# EAGLE board DP-webplatformv1.1a (EAGLE 5.11)
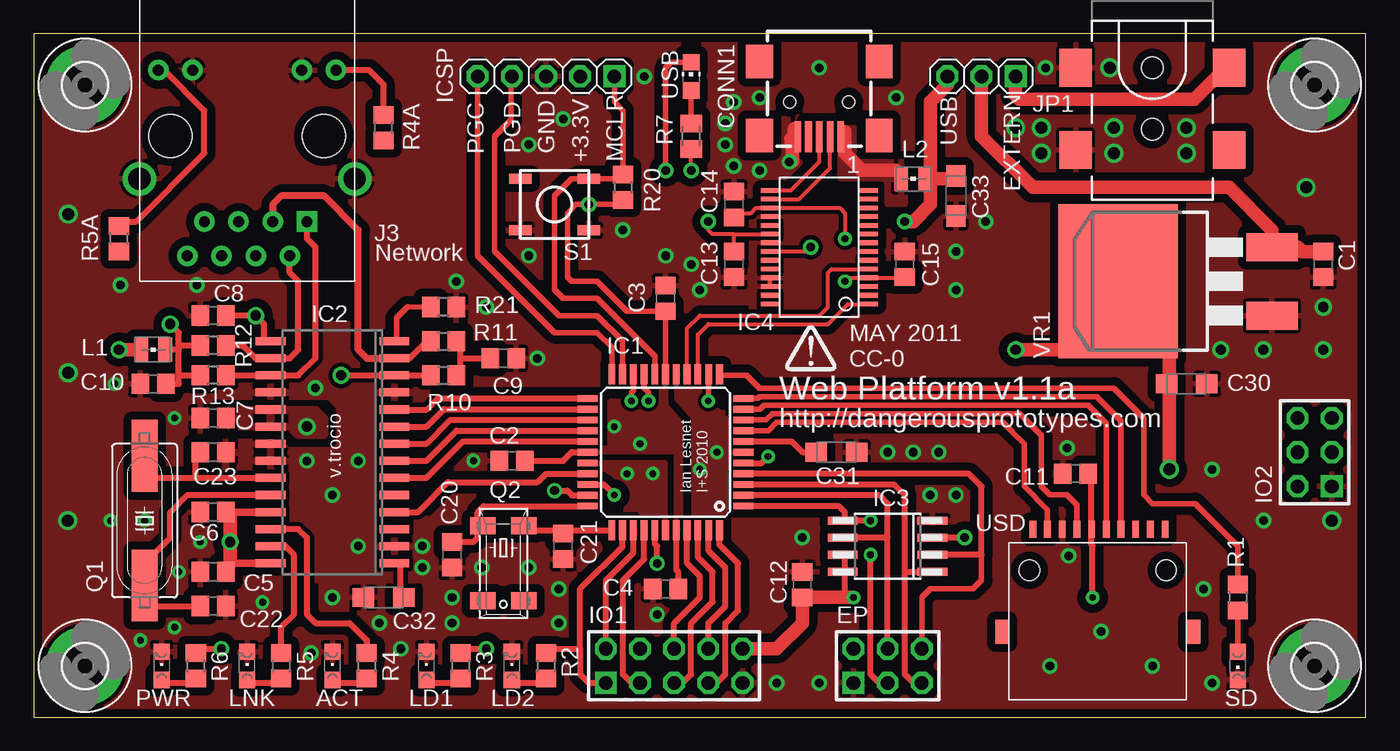
[diagram p0: board, top side]
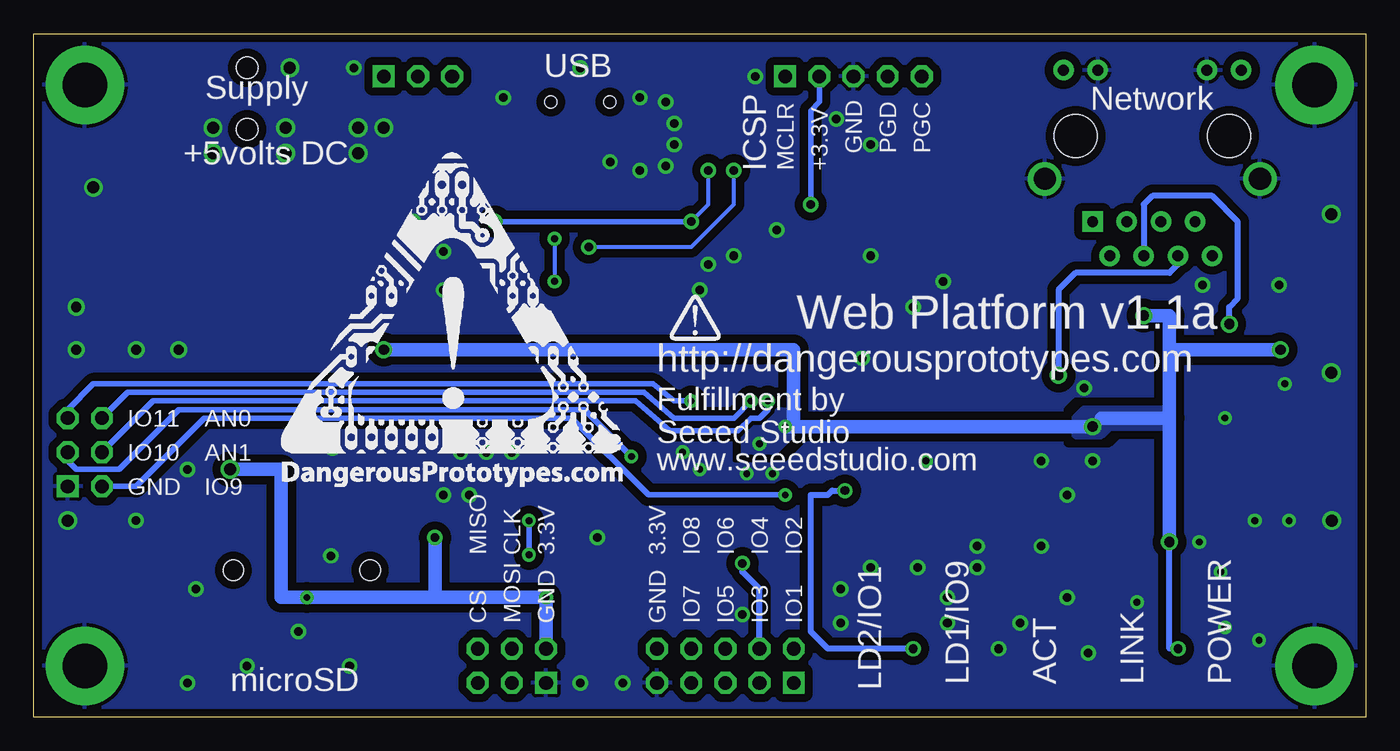
[diagram p1: board, bottom side, seen from below]

Size 99.06 x 50.8 mm. Coordinates in mm from the lower left corner, seen from the top.
Outline: 99.06,50.8 0,50.8 0,0 99.06,0 99.06,50.8
Copper layers (1*16): Top 0.035mm / dielectric 1.5mm / Bottom 0.035mm
Design rules "SparkFun": minimum track width 8mil, minimum drill 20mil, track to track 8mil, track to pad 8mil, pad to pad 8mil, via to via 8mil, smd to smd 8mil, copper to edge 10mil, drill to drill 8mil, minimum pad ring 12mil, minimum via ring 10mil, stop-mask expansion 4mil, vias tented up to drill 25mil, thermal gap 10mil

## Footprints (pad centres in the part's own frame; a part is rotated, then mirrored left to right if it is on the bottom)
CHIPLED_0805 = smd 1.2 x 1.2: A 0,-1.05; C 0,1.05
C0805 = smd 1.3 x 1.5: 1 -0.95,0; 2 0.95,0
SMC_A = smd 1.6 x 1.4: + -1.5,0; - 1.5,0
CONN_USB_MINI-B = smd 0.5 x 2.3: D+ 0,2.6; D- -0.8,2.6; GND 1.6,2.6; P4 0.8,2.6; VUSB -1.6,2.6 | smd 2 x 2.5: PC1 -4.45,2.5; PC2 4.45,2.5; PC3 4.45,-3; PC4 -4.45,-3 | hole 0.9: -2.2,0; 2.2,0
2X03 = drill 1.016 square: 1 -2.54,-1.27 | drill 1.016 octagon: 2 -2.54,1.27; 3 0,-1.27; 4 0,1.27; 5 2.54,-1.27; 6 2.54,1.27
3,3-PAD = drill 3.3 pad 5.842 round: B3,3 0,0
TQFP44 = smd 1.5 x 0.5: 1 -5.8,4; 2 -5.8,3.2; 3 -5.8,2.4; 4 -5.8,1.6; 5 -5.8,0.8; 6 -5.8,0; 7 -5.8,-0.8; 8 -5.8,-1.6; 9 -5.8,-2.4; 10 -5.8,-3.2; 11 -5.8,-4; 23 5.8,-4; 24 5.8,-3.2; 25 5.8,-2.4; 26 5.8,-1.6; 27 5.8,-0.8; 28 5.8,0; 29 5.8,0.8; 30 5.8,1.6; 31 5.8,2.4; 32 5.8,3.2; 33 5.8,4 | smd 0.5 x 1.5: 12 -4,-5.8; 13 -3.2,-5.8; 14 -2.4,-5.8; 15 -1.6,-5.8; 16 -0.8,-5.8; 17 0,-5.8; 18 0.8,-5.8; 19 1.6,-5.8; 20 2.4,-5.8; 21 3.2,-5.8; 22 4,-5.8; 34 4,5.8; 35 3.2,5.8; 36 2.4,5.8; 37 1.6,5.8; 38 0.8,5.8; 39 0,5.8; 40 -0.8,5.8; 41 -1.6,5.8; 42 -2.4,5.8; 43 -3.2,5.8; 44 -4,5.8
SO28W = smd 0.6 x 2.2: 1 -8.255,-4.6; 2 -6.985,-4.6; 3 -5.715,-4.6; 4 -4.445,-4.6; 5 -3.175,-4.6; 6 -1.905,-4.6; 7 -0.635,-4.6; 8 0.635,-4.6; 9 1.905,-4.6; 10 3.175,-4.6; 11 4.445,-4.6; 12 5.715,-4.6; 13 6.985,-4.6; 14 8.255,-4.6; 15 8.255,4.6; 16 6.985,4.6; 17 5.715,4.6; 18 4.445,4.6; 19 3.175,4.6; 20 1.905,4.6; 21 0.635,4.6; 22 -0.635,4.6; 23 -1.905,4.6; 24 -3.175,4.6; 25 -4.445,4.6; 26 -5.715,4.6; 27 -6.985,4.6; 28 -8.255,4.6
SO-08M = smd 0.6 x 2.2: 1 -1.905,-3.33; 2 -0.635,-3.33; 3 0.635,-3.33; 4 1.905,-3.33; 5 1.905,3.33; 6 0.635,3.33; 7 -0.635,3.33; 8 -1.905,3.33
SSOP28 = smd 0.348 x 1.397: 1 -4.225,-3.656; 2 -3.575,-3.656; 3 -2.925,-3.656; 4 -2.275,-3.656; 5 -1.625,-3.656; 6 -0.975,-3.656; 7 -0.325,-3.656; 8 0.325,-3.656; 9 0.975,-3.656; 10 1.625,-3.656; 11 2.275,-3.656; 12 2.925,-3.656; 13 3.575,-3.656; 14 4.225,-3.656; 15 4.225,3.656; 16 3.575,3.656; 17 2.925,3.656; 18 2.275,3.656; 19 1.625,3.656; 20 0.975,3.656; 21 0.325,3.656; 22 -0.325,3.656; 23 -0.975,3.656; 24 -1.625,3.656; 25 -2.275,3.656; 26 -2.925,3.656; 27 -3.575,3.656; 28 -4.225,3.656
1X05-S = drill 1.016 square: 1 -5.08,0 | drill 1.016 octagon: 2 -2.54,0; 3 0,0; 4 2.54,0; 5 5.08,0
2X05 = drill 1.016 square: 1 -5.08,-1.27 | drill 1.016 octagon: 2 -5.08,1.27; 3 -2.54,-1.27; 4 -2.54,1.27; 5 0,-1.27; 6 0,1.27; 7 2.54,-1.27; 8 2.54,1.27; 9 5.08,-1.27; 10 5.08,1.27
POWER_JACK_SMD = smd 2.8 x 2.4: GND 0,-5.7; P$4 6.1,-5.7; VIN0 0,5.7; VIN1 6.1,5.7 | hole 1.6: 0,0; 4.572,0
HR911105A = drill 0.813 pad 1.524 square: 1 4.445,-6.35 | drill 0.813 pad 1.524 round: 2 3.175,-8.89; 3 1.905,-6.35; 4 0.635,-8.89; 5 -0.635,-6.35; 6 -1.905,-8.89; 7 -3.175,-6.35; 8 -4.445,-8.89; 9 6.604,4.902; 10 4.064,4.902; 11 -4.064,4.902; 12 -6.604,4.902 | drill 1.651 pad 2.159 round: 13 8.001,-3.175; 14 -8.001,-3.175 | hole 3.2: 5.715,0; -5.715,0
1X03-S = drill 1.016 square: 1 -2.54,0 | drill 1.016 octagon: 2 0,0; 3 2.54,0
WE-KI_0805_B = smd 1.02 x 1.78: 1 -0.89,0; 2 0.89,0
HC49UP = smd 5.334 x 1.93: 1 -4.826,0; 2 4.826,0
MM20SS = smd 1.27 x 1.88: 1 -2.794,-1.524; 2 2.794,-1.524; 3 2.794,1.524; 4 -2.794,1.524
R0805 = smd 1.3 x 1.5: 1 -0.95,0; 2 0.95,0
M0805 = smd 1.3 x 1.6: 1 -0.95,0; 2 0.95,0
TACT_SWITCH_SMALL = smd 1.651 x 0.762: 1 -2.54,1.905; 2 2.54,1.905; 3 -2.54,-1.905; 4 2.54,-1.905
CHIP-LED0805 = smd 1.2 x 1.2: A 0,-1.05; C 0,1.05
MICROSD = smd 1.27 x 0.508: 1 0,-7.645; 2 0,-6.553; 3 0,-5.461; 4 0,-4.369; 5 0,-3.277; 6 0,-2.184; 7 0,-1.092; 8 0,0; 9 0,-8.738; 10 0,-9.83 | smd 1.778 x 1.016: RSV1 -7.62,2.286; RSV2 -7.62,-11.938 | hole 1.524: -3.048,-9.906; -3.048,0.254
D2PACK = smd 2.083 x 3.81: 1 -2.54,-8.89; 3 2.54,-8.89 | smd 11.43 x 8.89: 2 0,2.54

## Placement (x,y rotation side)
ACT  [CHIPLED_0805]  22.22,3.81 0 top
C1  0.1uF  [C0805]  95.89,33.66 270 top
C2  0.1uF  [C0805]  35.56,19.05 180 top
C3  0.1uF  [C0805]  46.99,31.11 90 top
C4  0.1uF  [C0805]  46.99,9.53 180 top
C5  0.1uF  [C0805]  13.34,10.79 180 top
C6  0.1uF  [C0805]  13.34,15.24 180 top
C7  0.1uF  [C0805]  13.34,22.23 180 top
C8  0.1uF  [C0805]  13.34,29.84 180 top
C9  0.1uF  [C0805]  34.92,26.67 0 top
C10  0.1uF  [C0805]  8.89,24.77 180 top
C11  0.1uF  [C0805]  77.47,18.1 180 top
C12  0.1uF  [C0805]  57.15,9.84 90 top
C13  0.1uF  [C0805]  52.07,33.66 270 top
C14  0.1uF  [C0805]  52.07,38.1 90 top
C15  0.1uF  [C0805]  64.77,33.66 90 top
C20  27pf  [C0805]  31.11,12.06 270 top
C21  27pf  [C0805]  39.37,12.7 270 top
C22  27pf  [C0805]  13.34,8.26 0 top
C23  27pf  [C0805]  13.34,19.68 0 top
C30  10uF  [SMC_A]  85.73,24.77 0 top
C31  10uF  [SMC_A]  59.69,19.68 0 top
C32  10uF  [SMC_A]  26.04,8.89 180 top
C33  10uF  [SMC_A]  68.58,38.73 270 top
CONN1  CONN_USB  [CONN_USB_MINI-B]  58.42,45.72 180 top
EP  [2X03]  63.5,3.81 0 top
H1  MOUNT-PAD-ROUND3.3  [3,3-PAD]  3.81,46.99 0 top
H2  MOUNT-PAD-ROUND3.3  [3,3-PAD]  95.25,46.99 0 top
H3  MOUNT-PAD-ROUND3.3  [3,3-PAD]  95.25,3.81 0 top
H4  MOUNT-PAD-ROUND3.3  [3,3-PAD]  3.81,3.81 0 top
IC1  PIC33FJ128GP204  [TQFP44]  46.99,19.68 180 top
IC2  ENC28J60-SO  [SO28W]  22.22,19.68 90 top
IC3  25SM  [SO-08M]  63.5,12.7 90 top
IC4  FT232RL  [SSOP28]  58.42,34.92 90 top
ICSP  [1X05-S]  38.1,47.62 180 top
IO1  [2X05]  47.62,3.81 0 top
IO2  [2X03]  95.25,19.68 90 top
J1  POWER_JACKSMD  [POWER_JACK_SMD]  83.19,48.26 270 top
J3  HR911105A  [HR911105A]  15.88,43.18 0 top
JP1  [1X03-S]  70.48,47.62 180 top
L1  [WE-KI_0805_B]  8.89,27.3 0 top
L2  100mA+ ferrite bead  [WE-KI_0805_B]  65.41,40.01 180 top
LD1  [CHIPLED_0805]  29.21,3.81 0 top
LD2  [CHIPLED_0805]  35.56,3.81 0 top
LINK  [CHIPLED_0805]  15.88,3.81 0 top
PWR  [CHIPLED_0805]  9.53,3.81 0 top
Q1  25Mhz  [HC49UP]  8.26,14.61 90 top
Q2  32.768khz  [MM20SS]  34.92,11.43 270 top
R1  1K1  [R0805]  89.53,8.89 270 top
R2  1K1  [R0805]  38.1,3.81 270 top
R3  1K1  [R0805]  31.75,3.81 270 top
R4  1K1  [R0805]  24.76,3.81 270 top
R4A  1K1  [R0805]  26.04,43.81 90 top
R5  1K1  [R0805]  18.41,3.81 270 top
R5A  1K1  [R0805]  6.35,35.56 90 top
R6  1K1  [R0805]  12.07,3.81 270 top
R7  1K1  [M0805]  48.9,43.18 270 top
R10  49R9 1%  [R0805]  30.48,25.4 0 top
R11  49R9 1%  [R0805]  30.48,27.94 0 top
R12  49R9 1%  [R0805]  13.34,27.62 180 top
R13  49R9 1%  [R0805]  13.34,25.4 180 top
R20  2K  [R0805]  43.82,39.37 270 top
R21  2K32  [R0805]  30.48,30.48 180 top
S1  [TACT_SWITCH_SMALL]  38.73,38.1 0 top
SD  [CHIPLED_0805]  89.53,3.81 180 top
U$1  [DP-LOGO]  55.88,25.72 0 top
U$2  [DP-LOGO-BOTTOM]  47.96,27.99 0 top
U$3  [DP_LOGO_ART_1X1]  80.64,17.14 0 bottom
USB  [CHIP-LED0805]  48.9,47.62 0 top
USD  MICROSD  [MICROSD]  74.3,13.97 90 top
VR1  LD117AD2MTR  [D2PACK]  83.19,32.38 90 top

## Library data of the parts
ACT LD1 LD2 LINK PWR SD USB = led
C1-C15 C20-C23 C30-C33 R1-R4 R4A R5 R5A R6 R10-R13 R20 R21 = rcl
CONN1 IC4 S1 U$1 U$3 = dp_devices
EP ICSP IO1 IO2 JP1 = pinhead-2
H1-H4 = holes
IC1 IC3 = microchip
IC2 = microchip-enc28j60
J1 = SparkFun
J3 = CONNECTER
L1 L2 = wuerth-elektronik
Q1 Q2 = crystal
R7 = resistor
U$2 = DP-logo
USD = Seeed
VR1 = v-reg

## Nets
5V+: C13.1 C33.+ IC4.20 JP1.3 L2.1 R7.2
AN0: IC1.19 IO2.6
AN1: IC1.20 IO2.4
BUS_PWR: CONN1.VUSB L2.2
CCT: C10.1 J3.4 L1.2 R12.2 R13.2
CTS: IC4.11
EE-CLK: EP.4 IC1.2 IC3.6
EE-CS: EP.5 IC1.3 IC3.1
EE-MISO: EP.6 IC1.4 IC3.2
EE-MOSI: EP.3 IC1.1 IC3.5
ETH-CLK: IC1.25 IC2.8
ETH-CS: IC1.24 IC2.9
ETH-INT: IC1.30 IC2.4
ETH-MISO: IC1.27 IC2.6
ETH-MOSI: IC1.26 IC2.7
ETH-RST: IC1.23 IC2.10
GND: ACT.C C1.2 C2.2 C3.2 C4.2 C5.2 C6.2 C7.2 C8.2 C9.2 C10.2 C11.2 C12.2 C13.2 C14.2 C15.2 C20.2 C21.2 C22.2 C23.2 C30.- C31.- C32.- C33.- CONN1.GND EP.1 H1.B3,3 H2.B3,3 H3.B3,3 H4.B3,3 IC1.6 IC1.16 IC1.29 IC1.39 IC2.2 IC2.11 IC2.18 IC2.21 IC2.22 IC3.4 IC4.7 IC4.18 IC4.21 IC4.25 IC4.26 ICSP.3 IO1.9 IO2.1 J1.GND J1.P$4 J3.10 J3.11 J3.13 J3.14 LD1.C LD2.C LINK.C PWR.C R21.1 S1.3 S1.4 SD.C USD.6 VR1.1
LED1: IC1.32 R3.1
LED_A: IC2.27 R5.1
LED_A2: R5A.1
LED_B: IC2.26 R4.1
LED_B2: R4A.1
LED_LINK: J3.9 R4A.2
LED_STATUS: J3.12 R5A.2
MCLR: IC1.18 ICSP.1 R20.1 S1.2
N$5: C20.1 IC1.33 Q2.1
N$6: C32.+ IC2.1
N$7: IC2.14 R21.2
N$9: C22.1 IC2.24 Q1.1
N$10: R7.1 USB.A
N$11: R1.2 SD.A
N$12: C23.1 IC2.23 Q1.2
N$13: LD2.A R2.2
N$14: LINK.A R5.2
N$15: CONN1.D+ IC4.15
N$16: CONN1.D- IC4.16
N$17: C14.1 C15.1 IC4.4 IC4.17
N$18: C31.+ IC1.7
N$19: C21.1 IC1.34 Q2.4
N$20: ACT.A R4.2
N$22: C9.1 R10.2 R11.2
N$25: USD.8
N$28: LD1.A R3.2
N$29: PWR.A R6.2
N$34: USD.1
PGC: IC1.22 ICSP.5
PGD: IC1.21 ICSP.4
RA3: IC1.31 IO2.2
RA7: IC1.13 IO2.5
RA9: IC1.35 IO1.1 R2.1
RB5: IC1.41 IO1.6
RB6: IC1.42 IO1.5
RB7: IC1.43 IO1.8
RB8: IC1.44 IO1.7
RC3: IC1.36 IO1.2
RC4: IC1.37 IO1.3
RC5: IC1.38 IO1.4
RC9: IC1.5 IO2.3
RD+: IC2.13 J3.3 R11.1
RD-: IC2.12 J3.6 R10.1
RTS: IC4.3
RX: IC1.15 IC4.5
RXLED: IC4.22 USB.C
SDCLK: IC1.9 USD.5
SDCS: IC1.11 USD.2
SDLED: IC1.12 R1.1
SDMISO: IC1.8 USD.7
SDMOSI: IC1.10 USD.3
TD+: IC2.17 J3.1 R13.1
TD-: IC2.16 J3.2 R12.1
TX: IC1.14 IC4.1
V+: C2.1 C3.1 C4.1 C5.1 C6.1 C7.1 C8.1 C11.1 C12.1 C30.+ EP.2 IC1.17 IC1.28 IC1.40 IC2.15 IC2.19 IC2.20 IC2.25 IC2.28 IC3.3 IC3.7 IC3.8 ICSP.2 IO1.10 L1.1 R6.1 R20.2 USD.4 VR1.2
VBAT: C1.1 JP1.2 VR1.3
VEXT: J1.VIN0 JP1.1

## Tracks (layer width: path | path; a pad name or v marks a point on that pad's centre or on a via)
5V+  (via drill 0.64)
  Top 0.305: v48.9,40.64 R7.2 | 52.07,35.9 50.46,35.9 50.16,36.2 v50.16,36.83 | 52.07,35.9 IC4.20 | C13.1 52.07,35.9
  Top 1.016: C33.+ 68.58,40.01 66.67,40.01 | 66.67,40.01 L2.1 66.67,40.38 66.67,45.72 67.95,46.99 JP1.3 | 66.67,40.01 66.67,38.1 65.41,36.83 v64.77,36.83
  Bottom 0.305: v48.9,40.64 48.9,38.1 v50.16,36.83
  Bottom 0.406: v50.16,36.83 v64.77,36.83
AN0  (via drill 0.51)
  Top 0.406: IC1.19 45.39,24.46 45.72,24.13 v45.72,23.5
  Bottom 0.406: v45.72,23.5 46.99,22.23 51.44,22.23 53.66,24.13 92.08,24.13 IO2.6
AN1  (via drill 0.51)
  Top 0.406: IC1.20 44.59,24.27 44.45,24.13 v44.45,23.5
  Bottom 0.406: 44.45,23.81 v44.45,23.5 44.45,22.86 45.09,22.23 45.72,22.23 46.67,21.27 51.75,21.27 54.29,23.5 90.17,23.5 IO2.4
BUS_PWR
  Top 1.016: 60.33,43.5 60.33,41.91 61.59,40.64 64.14,40.64
  pour Top: 60.01,43.81 60.96,43.81 60.96,41.27 64.77,41.27 64.77,38.1 63.5,38.1 63.5,39.69 63.18,40.01 60.01,40.01
CCT  (via drill 0.76)
  Top 0.457: 10.79,25.4 R13.2 | 10.79,25.4 10.79,27.3 | 10.79,27.3 10.79,27.62 | 10.79,27.62 10.79,28.57 v10.16,29.21 | 10.79,27.62 R12.2 | 10.79,27.3 L1.2 | C10.1 10.79,24.77 10.79,25.4
  Bottom 0.457: J3.4 16.51,38.1 15.88,38.73 11.43,38.73 9.53,36.83 9.53,31.11 10.16,30.48 v10.16,29.21
EE-CLK
  Top 0.457: EP.4 63.5,13.34 | 63.5,13.34 IC3.6 | IC1.2 62.89,16.48 63.5,15.88 63.5,13.34
EE-CS
  Top 0.457: 64.77,10.79 IC3.1 | 64.77,10.79 64.77,3.17 65.41,2.54 EP.5 | IC1.3 64,17.29 64.77,16.51 64.77,10.79
EE-MISO
  Top 0.406: EP.6 66.04,8.89 66.67,9.53 69.85,9.53 70.48,10.16 70.48,12.06
  Top 0.457: IC3.2 70.48,12.06 70.48,17.14 69.55,18.09 IC1.4
EE-MOSI  (via drill 0.51)
  Top 0.457: v62.23,14.61 IC3.5 60.33,14.76 60.33,15.24 59.88,15.69 IC1.1 | v62.23,12.06 62.23,3.17 62.87,2.54 EP.3
  Bottom 0.406: v62.23,12.06 v62.23,14.61
ETH-CLK
  Top 0.457: IC1.25 30.97,22.09 29.21,20.32 IC2.8
ETH-CS
  Top 0.457: IC1.24 30.5,22.89 29.21,21.59 IC2.9
ETH-INT
  Top 0.457: IC1.30 38.09,18.09 37.47,17.46 30.8,17.46 28.57,15.24 IC2.4
ETH-MISO
  Top 0.457: IC1.27 31.91,20.48 29.21,17.78 IC2.6
ETH-MOSI
  Top 0.406: IC2.7 27.3,19.05
  Top 0.457: IC1.26 31.45,21.29 29.21,19.05 27.3,19.05
ETH-RST
  Top 0.457: IC1.23 30.04,23.68 29.21,22.86 IC2.10
GND  (via drill 0.51, 0.64, 0.76, 0.89)
  Top 0.305: C13.2 52.07,32.38 | IC4.26 IC4.25
  Top 0.406: v56.2,41.27 56.03,43.08 56.24,43.28
  Top 0.457: CONN1.GND 56.58,43.12 56.52,43.18
  Top 0.813: v56.2,41.27 56.52,41.27 56.52,43.18 56.52,43.81
  other vias: 74.93,41.91 74.93,43.81 12.14,32.11 20.95,24.45 20.32,19.05 24.13,19.05 10.48,22.23 12.38,13.02 17.02,8.53 6.45,32.11 46.36,7.62 76.84,20 87.63,18.41 49.53,31.75 7.94,5.71 75.56,3.81 83.19,3.81 87,9.53 79.38,6.35 68.58,34.61 73.03,43.81 80.01,48.26 85.73,41.91 96.52,14.61 80.33,41.91 80.33,43.81 85.73,43.81 94.62,39.37 76.96,11.99 57.15,13.34 66.67,16.51 68.58,16.51 65.41,19.68 63.5,19.68 37.47,26.67 31.43,32.38 33.66,30.48 32.7,19.05 28.89,11.11 28.89,12.7 33.34,11.11 39.05,9.53 36.83,11.11 31.11,8.89 39.05,6.99 27.3,5.08 20.64,4.76 8.26,14.61 70.8,36.83 75.25,48.26 68.58,31.75 53.98,46.04 58.42,48.26 64.14,46.04 43.82,36.2 36.83,34.29 67.31,19.68 87.63,2.54 88.27,27.3 95.89,27.3 91.44,14.61 91.44,27.3 95.89,30.48 46.99,34.29 48.9,33.66 39.37,44.45 10.79,10.79 31.11,6.99 22.22,16.51 24.13,12.7 22.22,8.89 25.72,6.99 10.48,6.67 5.71,14.61 6.03,24.77 45.4,47.62 2.57,37.39 2.57,25.6 2.54,14.61 52.07,45.72 51.44,42.55 44.13,18.1 49.53,18.41 50.8,19.68 46.04,18.1 52.07,40.96 53.98,40.64 51.44,44.13 36.83,42.55 58.42,2.54 55.25,2.54
  pour Top (isolate 0.61, rank 2): 99.06,0 0,0 0,50.8 99.06,50.8
  pour Bottom (isolate 0.61, rank 2): 99.06,0 0,0 0,50.8 99.06,50.8
  pour Top (isolate 0.305): 53.34,38.73 62.23,38.73 62.23,29.84 53.34,29.84
  pour Top (isolate 0.254): 47.78,25.4 47.78,23.65 49.05,22.23 49.05,13.97 51.44,13.97 51.44,18.41 52.71,19.68 52.71,20.95 50.8,22.86 50.8,25.4
  pour Top (isolate 0.254): 41.28,18.89 41.28,18.41 43.18,18.41 45.09,16.51 45.09,15.24 46.83,15.24 46.83,14.61 46.99,14.61 46.99,18.89
  pour Top (isolate 0.305): 13.97,29.21 29.21,29.21 29.21,10.16 13.97,10.16 13.97,19.68 15.88,19.68 16.51,20.32 18.41,20.32 19.05,19.68 22.86,19.68 22.86,23.81 13.97,23.81
LED1  (via drill 0.64)
  Top 0.406: R3.1 32.29,5.08
  Top 0.457: IC1.32 40.03,16.48 39.69,16.83 v38.73,16.83 | 32.29,5.08 v33.66,5.08
  Bottom 0.457: v38.73,16.83 39.69,16.83 40.01,16.51 41.28,16.51 41.28,6.35 40.01,5.08 v33.66,5.08
LED_A
  Top 0.457: IC2.27 18.73,12.7 19.37,12.06 19.37,7.62 18.41,6.67 R5.1
LED_B
  Top 0.457: IC2.26 19.68,13.97 20.32,13.34 20.32,7.62 20.95,6.99 23.49,6.99 24.76,5.71 R4.1
LED_LINK
  Top 0.457: J3.9 24.94,48.08 26.04,46.99 R4A.2
LED_STATUS
  Top 0.457: J3.12 9.7,48.08 12.7,45.09 12.7,41.91 7.62,36.83 6.67,36.83 R5A.2
MCLR
  Top 0.406: ICSP.1 43.18,45.72 43.82,45.09 R20.1 43.82,40.01 S1.2 40.01,40.01 38.73,38.73 38.73,31.75 39.37,31.11 41.91,31.11 46.19,26.84 IC1.18
N$5
  Top 0.457: IC1.33 33.47,15.69 33.02,15.24 33.02,14.61 | 33.02,14.61 Q2.1 | 33.02,14.61 33.02,13.34 32.7,13.02 C20.1
N$6
  Top 0.457: IC2.1 27.3,11.43 27.3,9.12 C32.+
N$7
  Top 0.406: R21.2 27.8,30.49 26.97,29.67 26.97,28.01 IC2.14
N$9
  Top 0.457: IC2.24 11.43,16.51 10.16,15.24 10.16,13.34 8.26,11.43 Q1.1 8.26,8.26 C22.1
N$10
  Top 0.406: R7.1 USB.A
N$11
  Top 0.406: SD.A R1.2
N$12
  Top 0.457: 12.07,17.78 8.26,17.78 Q1.2 | 12.07,17.78 IC2.23 | C23.1 12.07,19.05 12.07,17.78
N$13
  Top 0.457: R2.2 38.1,2.54 35.78,2.54 LD2.A
N$14
  Top 0.457: R5.2 18.41,2.54 16.09,2.54 LINK.A
N$15
  Top 0.305: IC4.15 56.3,39.15 58.42,41.27 CONN1.D+
N$16
  Top 0.305: IC4.16 56.91,38.5 59.22,40.8 CONN1.D-
N$17  (via drill 0.51)
  Top 0.305: v60.33,35.56 60.33,37.47 59.94,37.85 IC4.17 53.73,37.85 53.34,37.47 52.39,37.47 C14.1 | v60.33,32.38 60.59,32.65 IC4.4 64.72,32.65 C15.1
  Bottom 0.305: v60.33,35.56 v60.33,32.38
N$18
  Top 0.457: IC1.7 56.35,20.48 57.15,19.68 C31.+
N$19
  Top 0.406: 39.09,13.41 C21.1 | Q2.4 36.66,14.11
  Top 0.457: 39.37,13.88 36.79,13.88 Q2.4 | 39.37,13.88 IC1.34 | 39.09,13.41 39.09,13.61 39.37,13.88
N$20
  Top 0.457: R4.2 24.76,2.54 22.45,2.54 ACT.A
N$22
  Top 0.457: R10.2 31.75,25.4 31.75,26.67 | R11.2 31.75,27.94 31.75,26.67 | 31.75,26.67 C9.1
N$28
  Top 0.457: R3.2 31.75,2.54 29.43,2.54 LD1.A
N$29
  Top 0.457: R6.2 12.07,2.54 9.74,2.54 PWR.A
PGC
  Top 0.406: ICSP.5 33.02,34.29 38.73,28.57 41.91,28.57 42.99,27.5 IC1.22
PGD
  Top 0.406: ICSP.4 35.51,47.55 35.51,44.4 34.29,43.18 34.29,34.61 39.05,29.84 41.91,29.84 43.79,27.96 IC1.21
RA3  (via drill 0.51)
  Top 0.457: IC1.31 42.41,17.29 v43.18,16.51
  Bottom 0.406: v43.18,16.51 53.34,16.51 59.05,22.23 86.36,22.23 91.44,17.14 IO2.2
RA7  (via drill 0.51)
  Top 0.406: IC1.13 50.19,24.16 50.16,24.13 v50.16,23.5
  Bottom 0.406: v50.16,23.5 51.44,23.5 53.02,24.77 94.62,24.77 96.52,22.86 IO2.5
RA9
  Top 0.457: IC1.35 43.79,12.68 40.64,9.53 40.64,5.08 | 40.64,5.08 40.64,3.17 41.28,2.54 IO1.1 | R2.1 38.1,5.08 40.64,5.08
RB5
  Top 0.457: IC1.41 48.59,11.42 49.53,10.48 49.53,8.89 47.62,6.99 IO1.6
RB6
  Top 0.457: IC1.42 49.39,11.89 50.48,10.79 50.48,8.57 48.9,6.99 48.9,3.17 48.26,2.54 IO1.5
RB7
  Top 0.457: IC1.43 50.19,12.36 51.44,11.11 51.44,8.26 50.16,6.99 IO1.8
RB8
  Top 0.457: IC1.44 50.99,12.83 52.39,11.43 52.39,7.94 51.44,6.99 51.44,3.17 50.8,2.54 IO1.7
RC3
  Top 0.457: IC1.36 44.59,12.21 42.55,10.16 IO1.2
RC4
  Top 0.457: IC1.37 45.39,11.73 43.82,10.16 43.82,3.17 44.45,2.54 IO1.3
RC5  (via drill 0.64)
  Top 0.457: IC1.38 46.19,12.87 46.36,12.7 v46.36,11.43
  Bottom 0.457: v46.36,11.43 46.36,10.79 45.09,9.53 IO1.4
RC9  (via drill 0.51)
  Top 0.457: IC1.5 54.13,18.89 v54.61,19.37
  Bottom 0.406: IO2.3 96.52,19.05 95.89,18.41 92.71,18.41 88.27,22.86 58.1,22.86 v54.61,19.37
RD+
  Top 0.457: IC2.13 27.94,26.67 29.21,27.94 R11.1
  Top 0.508: IC2.13 24.76,26.67 24.13,27.3 24.13,36.2 21.59,38.73 18.41,38.73 17.78,38.1 J3.3
RD-  (via drill 0.76)
  Top 0.457: R10.1 IC2.12 v22.86,25.4
  Bottom 0.457: J3.6 13.97,33.66 14.61,33.02 21.59,33.02 22.86,31.75 v22.86,25.4
RX
  Top 0.305: IC4.5 59.34,33.3 59.05,33.02 59.05,30.48 58.42,29.84 49.53,29.84 48.59,28.91 IC1.15
RXLED  (via drill 0.64)
  Top 0.305: IC4.22 57.46,34.6 v57.79,34.92
  Top 0.406: USB.C 47.41,48.67 46.99,48.26 v46.99,40.64
  Bottom 0.305: v57.79,34.92 50.16,34.92 46.99,38.1 v46.99,40.64
SDCLK
  Top 0.406: USD.5 77.57,15.77 76.84,16.51 75.56,16.51 74.93,17.14 74.93,20.95 73.34,22.54 54.93,22.54 54.47,22.09 IC1.9
SDCS
  Top 0.406: USD.2 80.85,22.02 79.06,23.81 53.98,23.81 53.85,23.68 IC1.11
SDLED
  Top 0.406: IC1.12 51.03,25.48 | R1.1 89.53,12.7 86.36,15.88 83.19,15.88 82.55,16.51 82.55,22.23 80.33,24.45 53.98,24.45 53.02,25.4 51.12,25.4
  Top 0.457: 51.03,25.48 51.12,25.4
SDMISO
  Top 0.406: USD.7 75.39,15.42 73.66,17.14 73.66,20.32 72.87,21.11 72.7,21.29 72.07,21.91 55.25,21.91 54.62,21.29 IC1.8
SDMOSI
  Top 0.406: USD.3 79.76,21.84 78.42,23.18 54.29,23.18 54,22.89 IC1.10
TD+
  Top 0.457: J3.1 20.32,35.56 20.95,34.92 20.95,26.67 19.68,25.4 IC2.17 R13.1
TD-
  Top 0.457: J3.2 19.05,33.02 19.68,32.38 19.68,27.3 19.05,26.67 IC2.16 16.51,26.67 15.56,27.62 R12.1
TX
  Top 0.305: IC4.1 60.55,30.7 59.05,29.21 50.16,29.21 49.39,28.43 IC1.14
V+  (via drill 0.51, 0.64, 0.76, 0.89)
  Top 0.406: C6.1 14.58,15.14 | 17.12,27.84 IC2.15 | 14.26,29.93 C8.1 14.26,29.88 14.2,29.93 | 14.58,30.38 14.58,30.31 | R20.2 43.82,38.1 v41.28,38.1 40.32,38.1 39.69,37.47 39.69,32.7 40.01,32.38 41.91,32.38 44.13,30.16 C3.1 IC1.17
  Top 0.457: C11.1 78.66,17.85 USD.4 78.66,12.78 78.74,12.7 v78.74,8.89 | v69.22,13.34 IC3.3 | IC3.7 60.33,12.06 60.33,10.95 IC3.8 60.33,10.79 60.33,8.89 | IC1.40 47.79,10.95 47.94,10.79 47.94,10.16 C4.1 | IC1.28 40.01,19.68 39.37,19.05 C2.1 | 17.12,27.84 17.12,29.23 v16.51,29.84 C8.1 14.36,30.16 14.58,30.38 | R6.1 12.07,5.08 v13.97,5.08
  Top 0.559: 14.61,15.24 C6.1 14.61,14.92 | 14.61,15.24 IC2.25 | 14.58,15.14 14.58,15.21 14.61,15.24 | C5.1 14.61,11.12 14.61,11.43 IC2.28
  Top 0.61: 14.26,29.93 14.08,30.11
  Top 1.016: v60.96,8.89 60.33,8.89 C12.1 57.15,6.99 55.25,5.08 IO1.10 | v6.35,27.3 L1.1 | 14.61,14.92 v14.61,13.02 14.61,11.43 | v73.03,27.3 80.01,27.3 | 80.01,27.3 VR1.2 | 84.45,24.77 84.45,27.3 80.01,27.3 | 84.45,24.77 v84.45,18.41 | 84.45,24.77 C30.+
  Bottom 0.406: ICSP.2 40.64,45.72 41.28,45.09 v41.28,38.1
  Bottom 0.457: v13.97,5.08 14.61,5.08 v14.61,13.02
  Bottom 1.016: v84.45,18.41 80.64,18.41 80.64,8.89 v78.74,8.89 69.22,8.89 | 69.22,8.89 v69.22,13.34 | 69.22,8.89 v60.96,8.89 EP.2 | 14.61,27.3 v6.35,27.3 | v16.51,29.84 14.61,29.84 14.61,27.3 | v14.61,13.02 14.61,22.23 | 14.61,22.23 14.61,27.3 | 14.61,22.23 19.68,22.23 | v20.32,21.59 42.55,21.59 | 42.55,21.59 v43.18,21.59 | 42.55,21.59 42.55,27.3 v73.03,27.3
  other vias: 45.09,20.32
  pour Top (isolate 0.254): 42.86,23.5 46.67,23.5 46.67,25.4 46.99,25.4 46.99,23.18 48.1,21.91 48.1,13.97 47.78,13.97 47.78,19.68 41.28,19.68 41.28,20 42.86,20
  pour Top (isolate 0.305): 14.61,22.86 20.95,22.86 21.59,22.23 21.59,20.95 19.68,20.95 19.05,21.59 14.61,21.59
  pour Bottom (isolate 0.305): 42.55,20.95 42.55,22.86 46.36,22.86 46.36,19.68 43.82,19.68
  pour Bottom (isolate 0.305): 14.61,22.86 20.95,22.86 21.59,22.23 21.59,20.95 19.68,20.95 19.05,21.59 14.61,21.59
VBAT
  Top 1.016: JP1.2 70.48,43.18 74.3,39.37 88.9,39.37 92.08,36.2 VR1.3 93.98,34.92 94.3,34.6 C1.1
VEXT
  Top 1.016: JP1.1 73,46.23 73.3,45.92 86.31,45.92 89.05,48.67 J1.VIN0

## Text on the board
tNames: USB | USB | EXTERN | PGC | PGD | GND | +3.3V | MCLR | Network | MAY 2011 | CC-0 | Web Platform v1.1a | http://dangerousprototypes.com | v.trocio | Ian Lesnet | I+S 2010 | PWR | LNK | ACT | LD1 | LD2 | SD
bNames: USB | ICSP | Supply | Network | PGC | PGD | GND | +3.3V | MCLR | +5volts DC | Web Platform v1.1a | http://dangerousprototypes.com | Fulfillment by | AN0 | IO11 | Seeed Studio | AN1 | IO10 | www.seeedstudio.com | IO9 | GND | IO2 | IO4 | IO6 | IO8 | 3.3V | 3.3V | CLK | MISO | IO1 | IO3 | IO5 | IO7 | GND | GND | MOSI | CS | POWER | LINK | ACT | LD1/IO9 | LD2/IO1 | microSD
tValues: RA0 | RA1 | GND | V+ | GND | RB15 | MCLR | V+ | GND | PGD3 | PGC3
Reference: ICSP | Supply | Network | +5volts DC | USB | PGC | PGD | GND | MCLR | +3.3V | WEB PLATFORM | CC-0 | Ian Lesnet 2010 | http://dangerousprototypes.com | Indicator LEDs | microSD